# EAGLE board pixy ESP daughter board v12 (EAGLE 9.7.0)
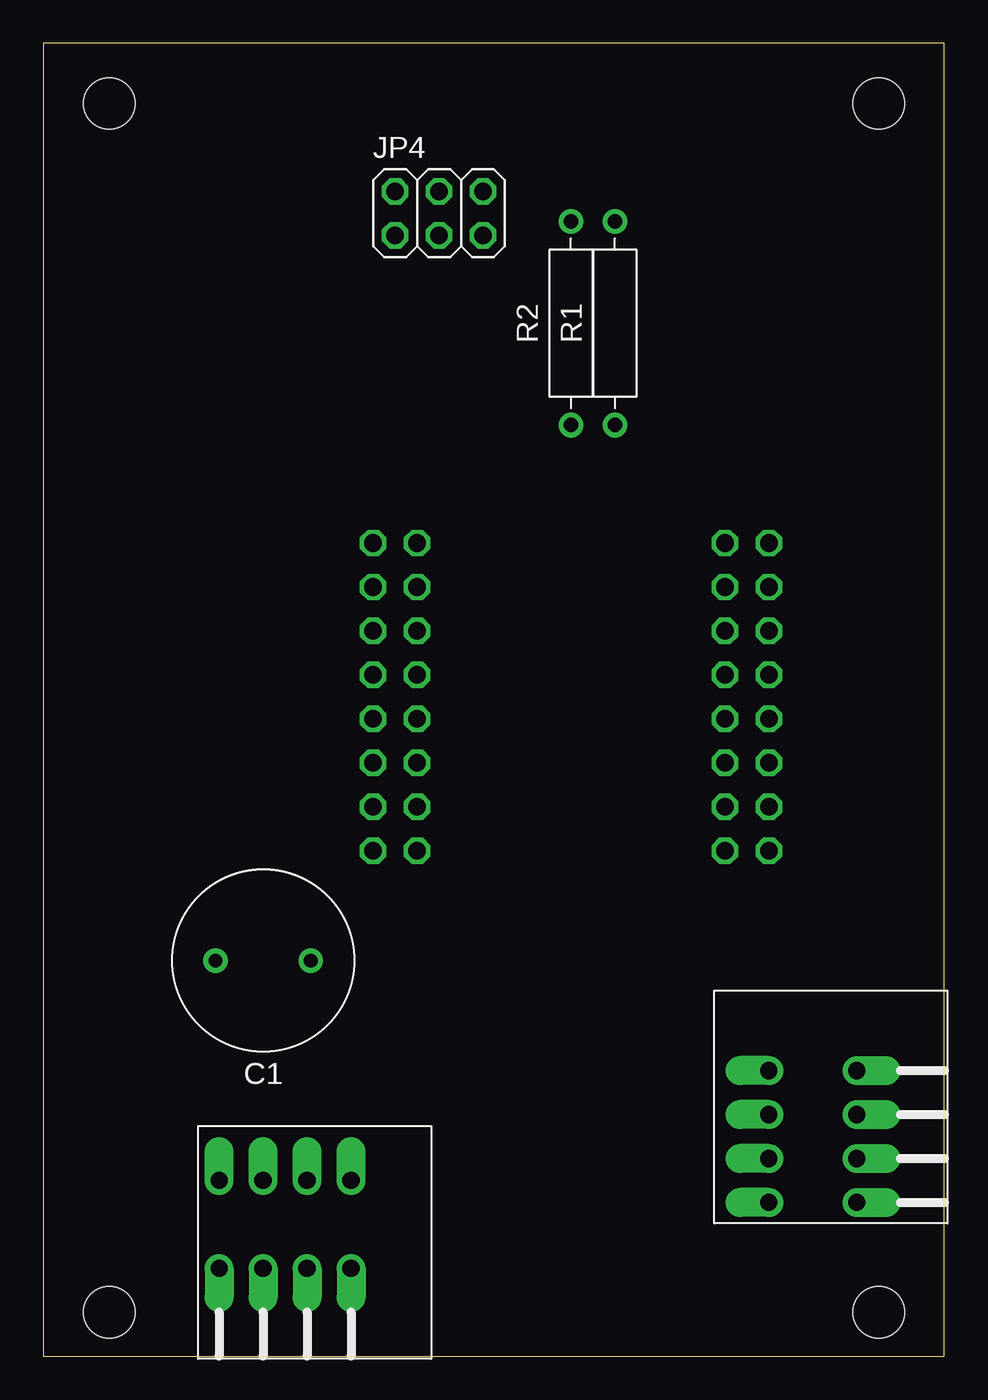
[diagram p0: board, top side]
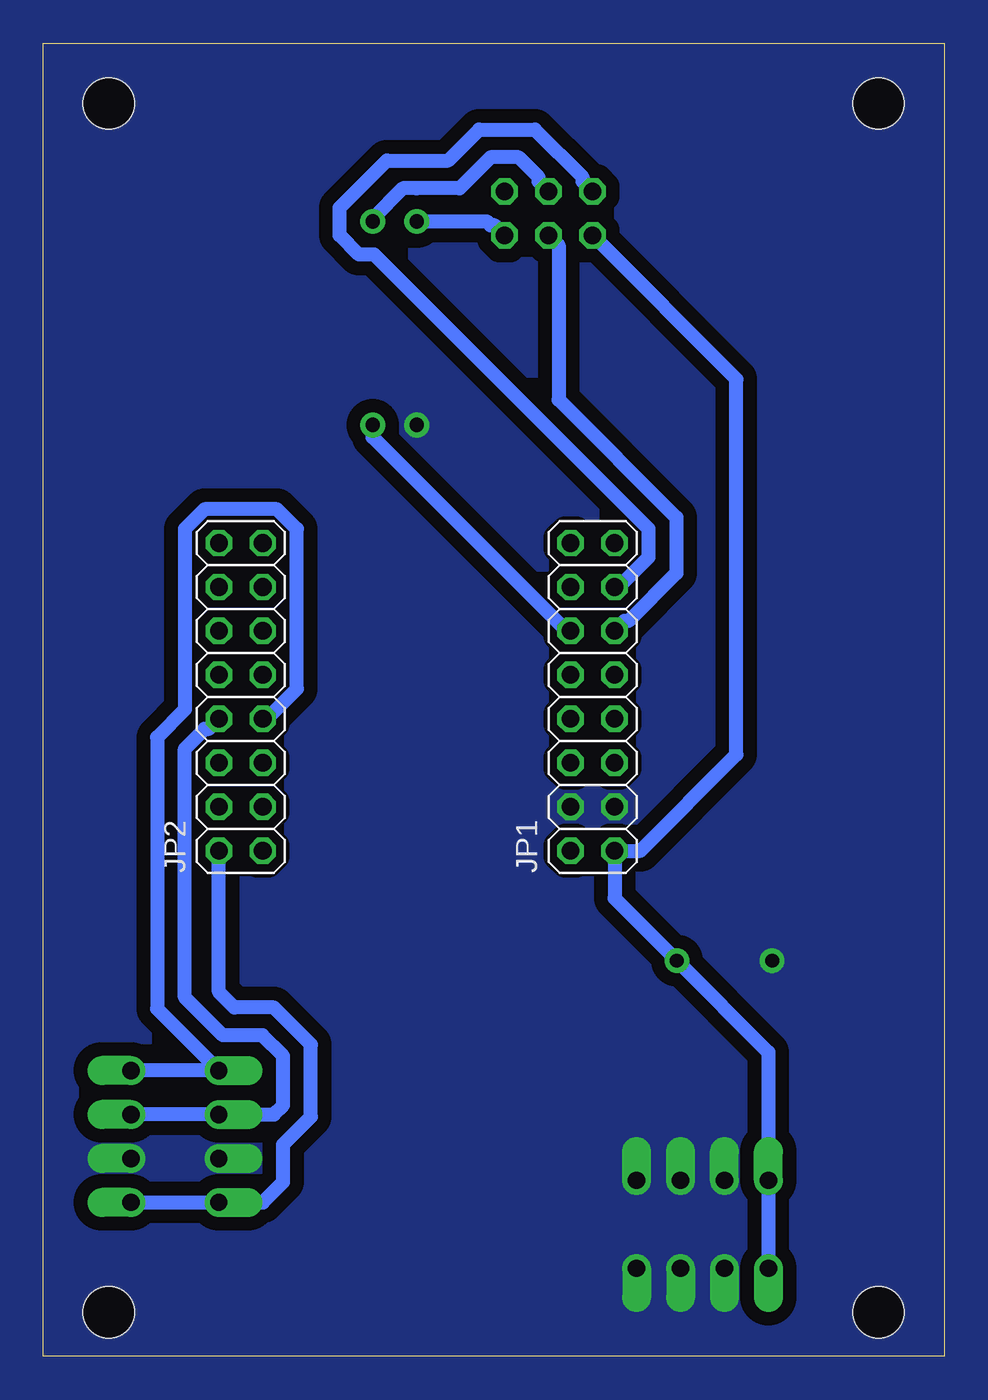
[diagram p1: board, bottom side, seen from below]

Size 52.05 x 75.87 mm. Coordinates in mm from the lower left corner, seen from the top.
Outline: 0,0 52.05,0 52.05,75.87 0,75.87 0,0
Copper layers (1*16): Top 0.035mm / dielectric 1.5mm / Bottom 0.035mm
Design rules "OthermillDRC_1_32_v2 *": minimum track width 32mil, minimum drill 0.8mm, track to track 0.794003125mm, track to pad 0.794003125mm, pad to pad 0.794003125mm, via to via 0.794003125mm, smd to smd 0mil, copper to edge 0mil, drill to drill 1mil, minimum pad ring 10mil, minimum via ring 10mil, stop-mask expansion 1mil, vias tented up to drill 30mil, thermal gap 10mil
Holes 2.95 mm at 3.81,2.54 48.26,2.54 48.26,72.39 3.81,72.39

## Footprints (pad centres in the part's own frame; a part is rotated, then mirrored left to right if it is on the bottom)
CAPRD550W60D1025H1250B = drill 0.8 pad 1.4: 1 -2.75,0; 2 2.75,0
2X08 = drill 1.016 octagon: 1 -8.89,-1.27; 2 -8.89,1.27; 3 -6.35,-1.27; 4 -6.35,1.27; 5 -3.81,-1.27; 6 -3.81,1.27; 7 -1.27,-1.27; 8 -1.27,1.27; 9 1.27,-1.27; 10 1.27,1.27; 11 3.81,-1.27; 12 3.81,1.27; 13 6.35,-1.27; 14 6.35,1.27; 15 8.89,-1.27; 16 8.89,1.27
2X03 = drill 1.016 octagon: 1 -2.54,-1.27; 2 -2.54,1.27; 3 0,-1.27; 4 0,1.27; 5 2.54,-1.27; 6 2.54,1.27
1-2834016-4 = drill 1 pad 1.676 offset: P$1 0,0; P$2 -5.08,0; P$3 0,-2.54; P$4 -5.08,-2.54; P$5 0,-5.08; P$6 -5.08,-5.08; P$7 0,-7.62; P$8 -5.08,-7.62
RESAD1176W63L850D250B = drill 0.83 pad 1.43: 1 -5.88,0; 2 5.88,0

## Placement (x,y rotation side)
C1  10u  [CAPRD550W60D1025H1250B]  12.7,22.86 180 top
JP1  PINHD-2X8  [2X08]  20.32,38.1 90 bottom
JP2  PINHD-2X8  [2X08]  40.64,38.1 90 bottom
JP4  PINHD-2X3  [2X03]  22.86,66.04 0 top
POWER_IN  TE_CONN_1-2834016-4  [1-2834016-4]  10.16,10.16 90 top
R1  0  [RESAD1176W63L850D250B]  33.02,59.69 90 top
R2  0  [RESAD1176W63L850D250B]  30.48,59.69 90 top
VL53L0X1  TE_CONN_1-2834016-4  [1-2834016-4]  41.91,8.89 180 top

## Library data of the parts
C1 = Capacitor; CATEGORY: Capacitor
JP1 JP2 = Connector; CATEGORY: Headers; DESCRIPTION: Header, Straight, 2x8 Position; MANUFACTURER: Generic; MPN: Generic; OPERATING_TEMPERATURE: Generic; PART_STATUS: Active; PITCH: 0.100" (2.54mm); ROHS_COMPLIANCE: Generic; SERIES: Generic; SUB-CATEGORY: Headers, Male Pins; TYPE: Board to Board or Cable, Unshrouded, Through Hole, Straight
JP4 = Connector; CATEGORY: Headers; DESCRIPTION: Header, Straight, 2x3 Position; MANUFACTURER: Generic; MPN: Generic; OPERATING_TEMPERATURE: Generic; PART_STATUS: Active; PITCH: 0.100" (2.54mm); ROHS_COMPLIANCE: Generic; SERIES: Generic; SUB-CATEGORY: Headers, Male Pins; TYPE: Board to Board or Cable, Unshrouded, Through Hole, Straight
POWER_IN = 1-2834016-4; N: POWER_IN
R1 R2 = Resistor; CATEGORY: Resistor; SUB-CATEGORY: Fixed
VL53L0X1 = 1-2834016-4; N: VL53L0X

## Nets
3V3: JP2.2 VL53L0X1.P$1 VL53L0X1.P$2
35: JP1.11 JP4.3
36: JP1.12 R1.1
36_PIXY: JP4.4 R1.2
37: JP1.13 JP4.2
GND: C1.2 JP1.3 JP1.4 POWER_IN.P$3 POWER_IN.P$4 POWER_IN.P$5 POWER_IN.P$6 POWER_IN.P$7 POWER_IN.P$8 R2.1 VL53L0X1.P$3 VL53L0X1.P$4
GND_PIXY: JP4.5 R2.2
SCL: JP2.8 VL53L0X1.P$5 VL53L0X1.P$6
SDA: JP2.7 VL53L0X1.P$7 VL53L0X1.P$8
VDD: C1.1 JP1.1 JP4.1 POWER_IN.P$1 POWER_IN.P$2

## Tracks (layer width: path | path; a pad name or v marks a point on that pad's centre or on a via)
3V3
  Bottom 0.813: 41.27,8.89 VL53L0X1.P$1 41.27,8.89 | VL53L0X1.P$2 41.27,8.89 | 41.27,8.89 39.37,8.89 38.2,10.06 38.2,12.24 36.59,13.84 36.59,18.02 38.72,20.16 41.01,20.16 41.91,21.05 JP2.2
35
  Bottom 0.813: JP4.3 22.28,64.19 22.28,55.27 15.48,48.47 15.48,45.24 18.24,42.49 18.47,42.49 JP1.11
36
  Bottom 0.813: R1.1 33.02,53.1 21.82,41.91 JP1.12
36_PIXY
  Bottom 0.813: JP4.4 23.44,67.89 23.44,68.12 24.59,69.27 26.21,69.27 28,67.48 30.48,67.48 31.27,67.48 33.02,65.74 R1.2
37
  Bottom 0.813: JP4.2 20.9,67.89 20.9,68.12 23.65,70.88 26.88,70.88 28.66,69.09 32.21,69.09 34.94,66.36 34.94,64.78 33.81,63.66 32.94,63.66 17.09,47.8 17.09,46.18 18.82,44.45 JP1.13
GND
  pour Bottom (no thermals): -4.67,-4.67 58.01,-4.67 58.01,80.87 -4.67,80.87
GND_PIXY
  Bottom 0.813: R2.2 26.43,65.57 26.21,65.35 25.98,65.35 JP4.5
SCL
  Bottom 0.813: VL53L0X1.P$6 VL53L0X1.P$5 38.73,13.97 38.2,14.51 38.2,17.35 39.39,18.55 41.68,18.55 43.87,20.75 43.87,35.1 42.72,36.25 42.49,36.25 JP2.8
SDA
  Bottom 0.813: JP2.7 39.13,36.83 37.41,38.56 37.41,47.8 38.56,48.95 42.72,48.95 43.87,47.8 43.87,37.38 45.48,35.77 45.48,20.08 VL53L0X1.P$7 VL53L0X1.P$8
VDD
  Bottom 0.813: POWER_IN.P$2 POWER_IN.P$1 10.16,11.84 10.16,17.57 C1.1 19.05,26.46 JP1.1 17.56,29.21 12.01,34.77 12.01,56.46 JP4.1